# EAGLE board 002 (EAGLE 9.2.2)
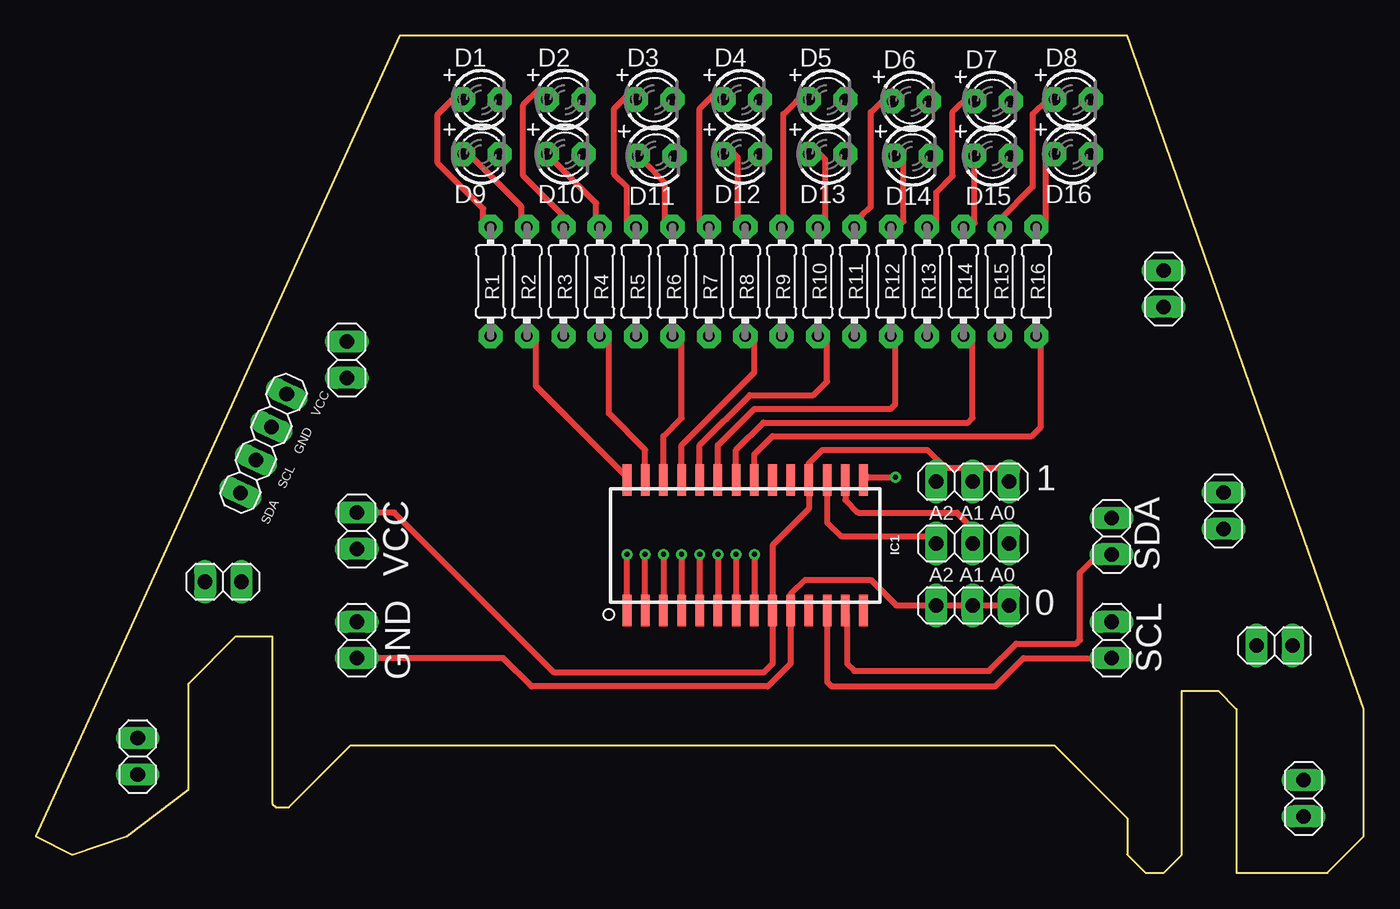
[diagram p0: board, top side]
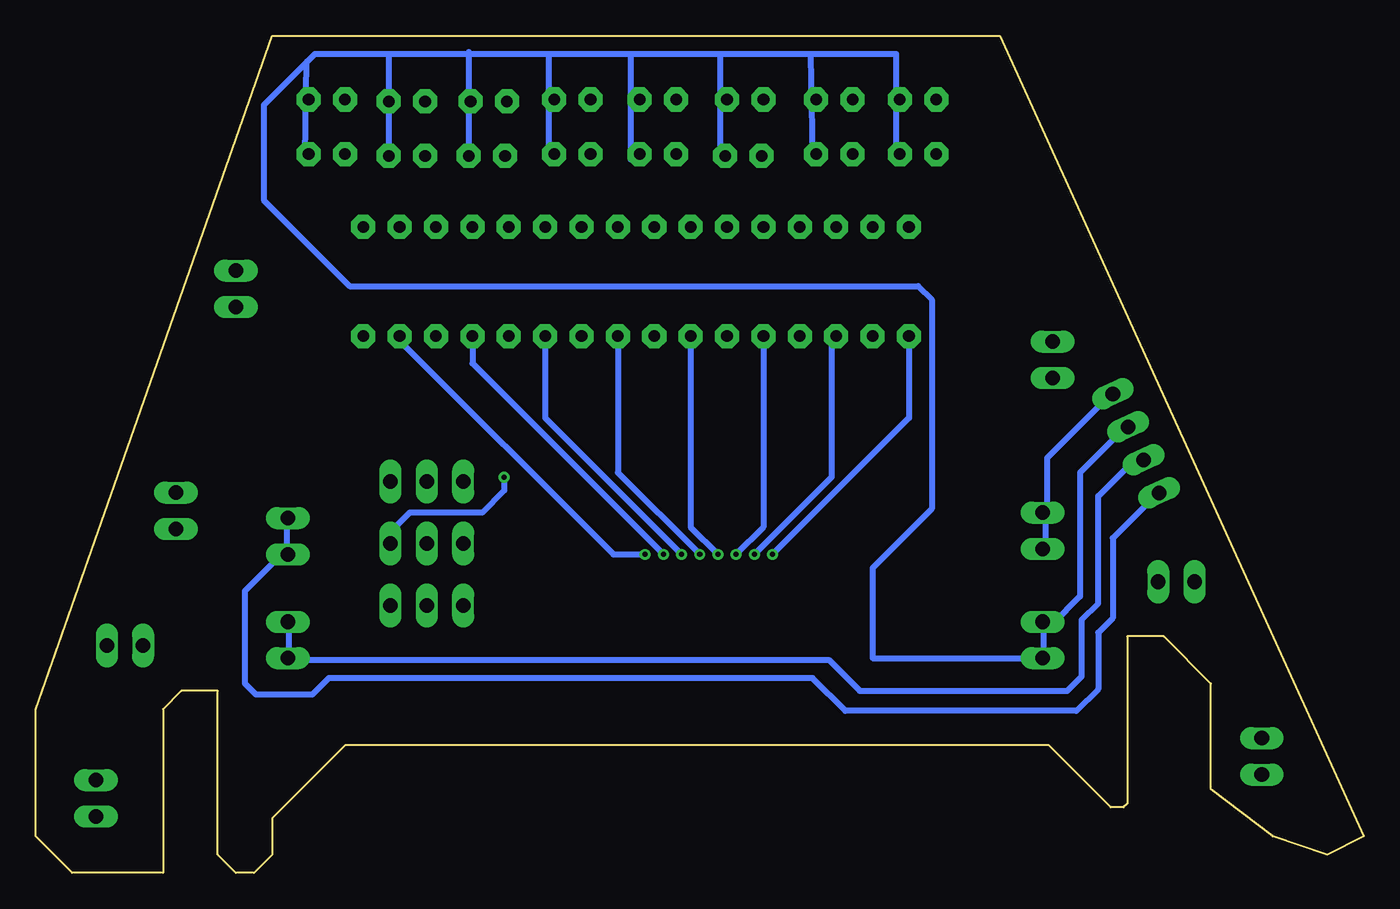
[diagram p1: board, bottom side, seen from below]

Size 92.71 x 58.42 mm. Coordinates in mm from the lower left corner, seen from the top.
Outline: 21.97,8.89 71.12,8.89 76.2,3.81 76.2,1.27 77.47,0 78.74,0 80.01,1.27 80.01,12.7 82.55,12.7 83.82,11.43 83.82,0 90.17,0 92.71,2.54 92.71,11.43 76.2,58.42 25.4,58.42 0,2.54 2.54,1.27 6.35,2.54 10.67,5.84 10.67,13.21 13.97,16.51 16.51,16.51 16.51,4.83 16.76,4.57 17.65,4.57 21.97,8.89
Copper layers (1*16): Top 0.035mm / dielectric 1.5mm / Bottom 0.035mm
Design rules "default": minimum track width 6mil, minimum drill 0.35mm, track to track 6mil, track to pad 6mil, pad to pad 6mil, via to via 6mil, smd to smd 6mil, copper to edge 40mil, drill to drill 6mil, minimum pad ring 10mil, minimum via ring 8mil, stop-mask expansion 4mil, vias tented up to drill 0mil, thermal gap 10mil

## Footprints (pad centres in the part's own frame; a part is rotated, then mirrored left to right if it is on the bottom)
LED3MM = drill 0.813 pad 1.676 octagon: A -1.27,0; K 1.27,0
1X03 = drill 1.016 long: 1 -2.54,0; 2 0,0; 3 2.54,0
1X02 = drill 1.016 long: 1 -1.27,0; 2 1.27,0
1X04 = drill 1.016 long: 1 -3.81,0; 2 -1.27,0; 3 1.27,0; 4 3.81,0
SOIC-28 = smd 0.6 x 2.2: 1 8.89,4.548; 2 7.62,4.548; 3 6.35,4.548; 4 5.08,4.548; 5 3.81,4.548; 6 2.54,4.548; 7 1.27,4.548; 8 0,4.548; 9 -1.27,4.548; 10 -2.54,4.548; 11 -3.81,4.548; 12 -5.08,4.548; 13 -6.35,4.548; 14 -7.62,4.548; 15 -7.62,-4.548; 16 -6.35,-4.548; 17 -5.08,-4.548; 18 -3.81,-4.548; 19 -2.54,-4.548; 20 -1.27,-4.548; 21 0,-4.548; 22 1.27,-4.548; 23 2.54,-4.548; 24 3.81,-4.548; 25 5.08,-4.548; 26 6.35,-4.548; 27 7.62,-4.548; 28 8.89,-4.548
0204/7 = drill 0.813 pad 1.676 octagon: 1 -3.81,0; 2 3.81,0

## Placement (x,y rotation side)
D1  [LED3MM]  31.11,53.98 0 top
D2  [LED3MM]  36.96,53.98 0 top
D3  [LED3MM]  43.18,53.98 0 top
D4  [LED3MM]  49.28,53.98 0 top
D5  [LED3MM]  55.24,53.98 0 top
D6  [LED3MM]  61.09,53.85 0 top
D7  [LED3MM]  66.8,53.85 0 top
D8  [LED3MM]  72.39,53.98 0 top
D9  [LED3MM]  31.11,50.17 0 top
D10  [LED3MM]  36.96,50.17 0 top
D11  [LED3MM]  43.31,50.04 0 top
D12  [LED3MM]  49.28,50.17 0 top
D13  [LED3MM]  55.24,50.17 0 top
D14  [LED3MM]  61.21,50.04 0 top
D15  [LED3MM]  66.8,50.04 0 top
D16  [LED3MM]  72.39,50.17 0 top
E$1  [1X03]  65.41,27.3 0 top
E$2  [1X02]  75.12,16.26 90 top
E$3  [1X02]  22.42,23.88 90 top
E$4  [1X03]  65.41,22.99 0 top
E$5  [1X03]  65.41,18.67 0 top
E$6  [1X02]  82.93,25.27 90 top
E$7  [1X02]  21.72,35.81 90 top
E$8  [1X02]  78.74,40.77 90 top
E$9  [1X02]  86.49,15.88 180 top
E$10  [1X02]  7.11,8.13 90 top
E$11  [1X02]  13.08,20.32 180 top
E$12  [1X02]  88.52,5.21 90 top
E$13  [1X02]  22.42,16.26 90 top
E$14  [1X02]  75.12,23.5 90 top
E$15  [1X04]  15.9,29.98 245 top
IC1  [SOIC-28]  50.16,22.86 180 top
R1  [0204/7]  31.75,41.28 90 top
R2  [0204/7]  34.29,41.28 90 top
R3  [0204/7]  36.83,41.28 90 top
R4  [0204/7]  39.37,41.28 90 top
R5  [0204/7]  41.91,41.28 90 top
R6  [0204/7]  44.45,41.28 90 top
R7  [0204/7]  46.99,41.28 90 top
R8  [0204/7]  49.53,41.28 90 top
R9  [0204/7]  52.07,41.28 90 top
R10  [0204/7]  54.61,41.28 90 top
R11  [0204/7]  57.15,41.28 90 top
R12  [0204/7]  59.69,41.28 90 top
R13  [0204/7]  62.23,41.28 90 top
R14  [0204/7]  64.77,41.28 90 top
R15  [0204/7]  67.31,41.28 90 top
R16  [0204/7]  69.85,41.28 90 top

## Library data of the parts
D1-D16 R1-R16 = adafruit
E$1-E$15 = pinhead
IC1 = SparkFun-IC-Microcontroller

## Nets
S$1: E$5.3
S$2: E$3.2
S$3: E$2.1
S$36: E$2.2
S$39: R13.1
S$40: R11.1
S$41: R9.1
S$42: R7.1
S$43: R5.1
S$45: R1.1

## Tracks (layer width: path | path; a pad name or v marks a point on that pad's centre or on a via)
S$1
  Top 0.406: 22.48,14.99 32.64,14.99 34.61,13.02 51.12,13.02 52.7,14.61 52.7,19.43 53.72,20.45 58.29,20.45 60.07,18.67 E$5.3
S$2
  Top 0.406: 53.98,26.67 53.98,25.4 51.44,22.86 51.44,14.61 50.8,13.97 36.2,13.97 25.02,25.15 E$3.2
S$3
  Top 0.406: 55.24,18.1 55.24,13.33 55.56,13.02 66.99,13.02 68.96,14.99 E$2.1
S$4
  Top 0.406: 56.64,18.03 56.64,14.61 57.15,14.1 66.55,14.1 68.45,16 72.64,16 72.9,16.26 72.9,20.95 74.55,22.61
S$5
  Top 0.406: 50.16,27.3 50.16,29.21 51.44,30.48 69.53,30.48 70.17,31.11 70.17,37.47
S$6
  Top 0.406: 48.89,27.3 48.89,29.53 50.8,31.43 65.09,31.43 65.41,31.75 65.41,37.47
S$7
  Top 0.406: 47.62,27.3 47.62,29.84 50.16,32.38 59.69,32.38 60.01,32.7 60.01,37.47
S$8
  Top 0.406: 46.35,27.3 46.35,29.84 49.85,33.34 54.29,33.34 55.24,34.29 55.24,37.47
S$9
  Top 0.406: 45.09,27.3 45.09,29.84 50.16,34.93 50.16,37.47
S$10
  Top 0.406: 43.81,27.3 43.81,30.48 45.09,31.75 45.09,37.47
S$11
  Top 0.406: 42.55,27.62 42.55,29.53 40.01,32.07 40.01,37.47
S$12
  Top 0.406: 41.27,27.62 34.92,33.97 34.92,37.47
S$13
  Bottom 0.406: 73.91,50.04 73.79,56.64
S$14
  Bottom 0.406: 62.48,57.28 62.48,49.66
S$15
  Bottom 0.406: 38.61,57.02 38.48,50.04
S$16
  Bottom 0.406: 32.64,50.04 32.64,57.15 44.96,57.15 | 44.96,57.15 51.18,57.15 | 51.18,57.15 56.9,57.15 | 56.9,57.15 68.07,57.15 | 68.07,57.15 73.23,57.15 76.8,53.58 76.8,46.95 70.8,40.96 31.11,40.96 30.16,40.01 30.16,25.4 34.29,21.27 34.29,14.99 22.35,14.99 | 68.07,57.15 68.07,49.78 | 56.9,57.15 56.9,49.66 | 51.18,57.15 51.18,49.78 | 44.96,57.15 44.96,49.78
S$17
  Top 0.406: 70.61,53.98 69.6,52.96 69.6,47.88 67.31,45.59
S$18
  Top 0.406: 65.53,45.34 65.53,49.28 66.04,49.78
S$19
  Top 0.406: 62.87,45.09 62.87,47.5 64.01,48.64 64.01,53.09 65.28,54.36
S$20
  Top 0.406: 70.48,50.09 70.48,45.09
S$21
  Top 0.406: 60.2,45.09 60.58,45.47 60.58,50.17
S$22
  Top 0.406: 57.66,45.21 57.66,45.85 58.29,46.48 58.29,53.09 59.82,54.61
S$23
  Top 0.406: 55.12,45.21 55.12,49.78 54.36,50.55
S$24
  Top 0.406: 52.2,45.85 52.2,52.96 53.85,54.61
S$25
  Top 0.406: 49.02,45.34 49.02,49.91 48.64,50.29
S$26
  Top 0.406: 46.35,45.47 46.35,53.34 47.62,54.61
S$27
  Top 0.406: 43.94,45.47 43.94,48.13 42.42,49.66
S$28
  Top 0.406: 41.27,45.21 41.27,47.88 40.39,48.77 40.39,53.34 41.53,54.48
S$29
  Top 0.406: 39.12,45.59 39.12,46.74 36.07,49.78
S$30
  Top 0.406: 53.98,28.26 53.98,28.57 54.93,29.53 62.23,29.53 63.5,28.26 68.58,28.26
S$31
  Top 0.406: 55.24,26.67 55.24,24.45 56.2,23.5 62.55,23.5
S$32
  Top 0.406: 56.52,26.67 56.52,26.04 57.4,25.15 64.33,25.15 65.41,24.07
S$33  (via drill 0.35)
  Top 0.406: 57.78,27.3 58.1,27.62 v60.01,27.62
  Bottom 0.406: v60.01,27.62 60.01,26.67 61.53,25.15 66.61,25.15 67.88,23.88
S$34
  Top 0.406: 36.96,45.72 34.04,48.64 34.04,53.59 35.05,54.61 35.81,54.61
S$35
  Top 0.406: 33.91,45.47 33.91,46.48 29.72,50.67
S$36
  Top 0.406: 74.99,17.65 E$2.2
S$37
  Top 0.406: 31.24,45.47 31.24,46.36 28.07,49.53 28.07,52.96 29.72,54.61
S$38  (via drill 0.35)
  Top 0.406: v50.16,22.22 50.16,18.41
  Bottom 0.406: 67.63,37.47 52.39,22.22 v50.16,22.22
S$39  (via drill 0.35)
  Top 0.406: v48.89,22.22 48.89,18.41
  Bottom 0.406: R13.1 62.23,35.56 v48.89,22.22
S$40  (via drill 0.35)
  Top 0.406: v47.62,22.22 47.62,18.41
  Bottom 0.406: R11.1 57.15,31.75 v47.62,22.22
S$41  (via drill 0.35)
  Top 0.406: v46.35,22.22 46.35,18.41
  Bottom 0.406: R9.1 52.07,27.94 v46.35,22.22
S$42  (via drill 0.35)
  Top 0.406: v45.09,22.22 45.09,18.41
  Bottom 0.406: R7.1 46.99,24.13 v45.09,22.22
S$43  (via drill 0.35)
  Top 0.406: v43.81,22.22 43.81,18.41
  Bottom 0.406: R5.1 41.91,24.13 v43.81,22.22
S$44  (via drill 0.35)
  Top 0.406: 42.55,18.41 v42.55,22.22
  Bottom 0.406: 37.15,37.47 37.15,27.62 v42.55,22.22
S$45  (via drill 0.35)
  Top 0.406: 41.27,18.1 v41.27,22.22
  Bottom 0.406: R1.1 31.75,31.75 v41.27,22.22
S$46
  Bottom 0.406: 22.1,25.02 22.1,28.96 17.78,33.27
S$47
  Bottom 0.406: 22.22,25.27 22.22,22.35
S$48
  Bottom 0.406: 22.35,17.65 22.35,15.11
S$49
  Bottom 0.406: 75.18,25.15 75.18,21.72
S$50
  Bottom 0.406: 75.06,17.78 75.06,14.48
S$51
  Bottom 0.406: 16.89,30.86 19.81,27.94 19.81,19.3 21.72,17.4 21.97,17.4
S$52
  Bottom 0.406: 74.93,14.86 37.34,14.86 35.18,12.7 20.7,12.7 19.68,13.72 19.68,17.65 18.54,18.8 18.54,26.29 16.13,28.7
S$53
  Bottom 0.406: 14.73,26.16 17.53,23.37 17.53,17.78 18.54,16.76 18.54,12.83 20.07,11.3 36.2,11.3 38.48,13.59 72.26,13.59 73.41,12.45 77.34,12.45 78.11,13.21 78.11,19.68 75.82,21.97 75.82,22.35

## Text on the board
tNames: 1 | SDA SCL GND VCC | A2 A1 A0 | SDA | VCC | A2 A1 A0 | 0 | SCL | GND